# Altium PCB AT89S52单片机入门与提高_粗.PcbDoc (part 1 of 5)
Units mm, origin at the board's own origin, x right, y up, seen from the top; angles counter-clockwise.
Board outline 152.4 x 101.6 mm, 2 copper layers (Top Layer, Bottom Layer); 111 components, 112 nets, 451 pads, 42 vias.
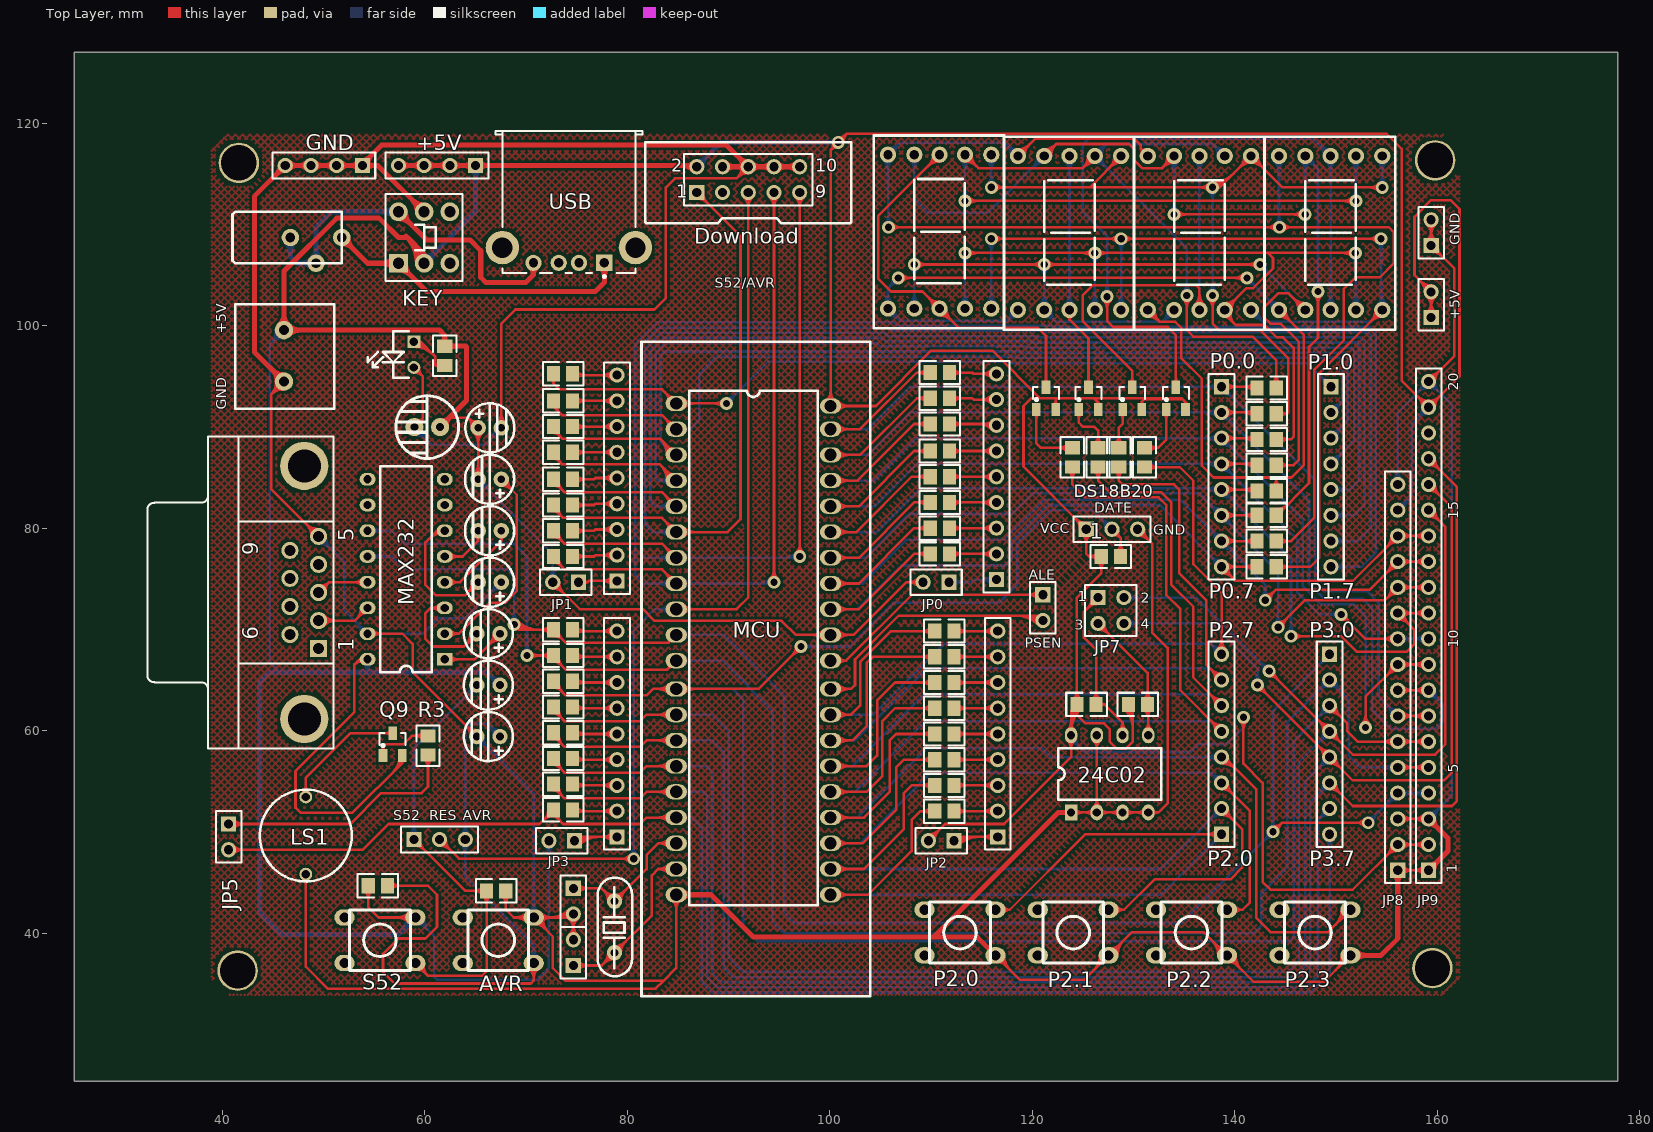
[diagram p0: Top Layer view]
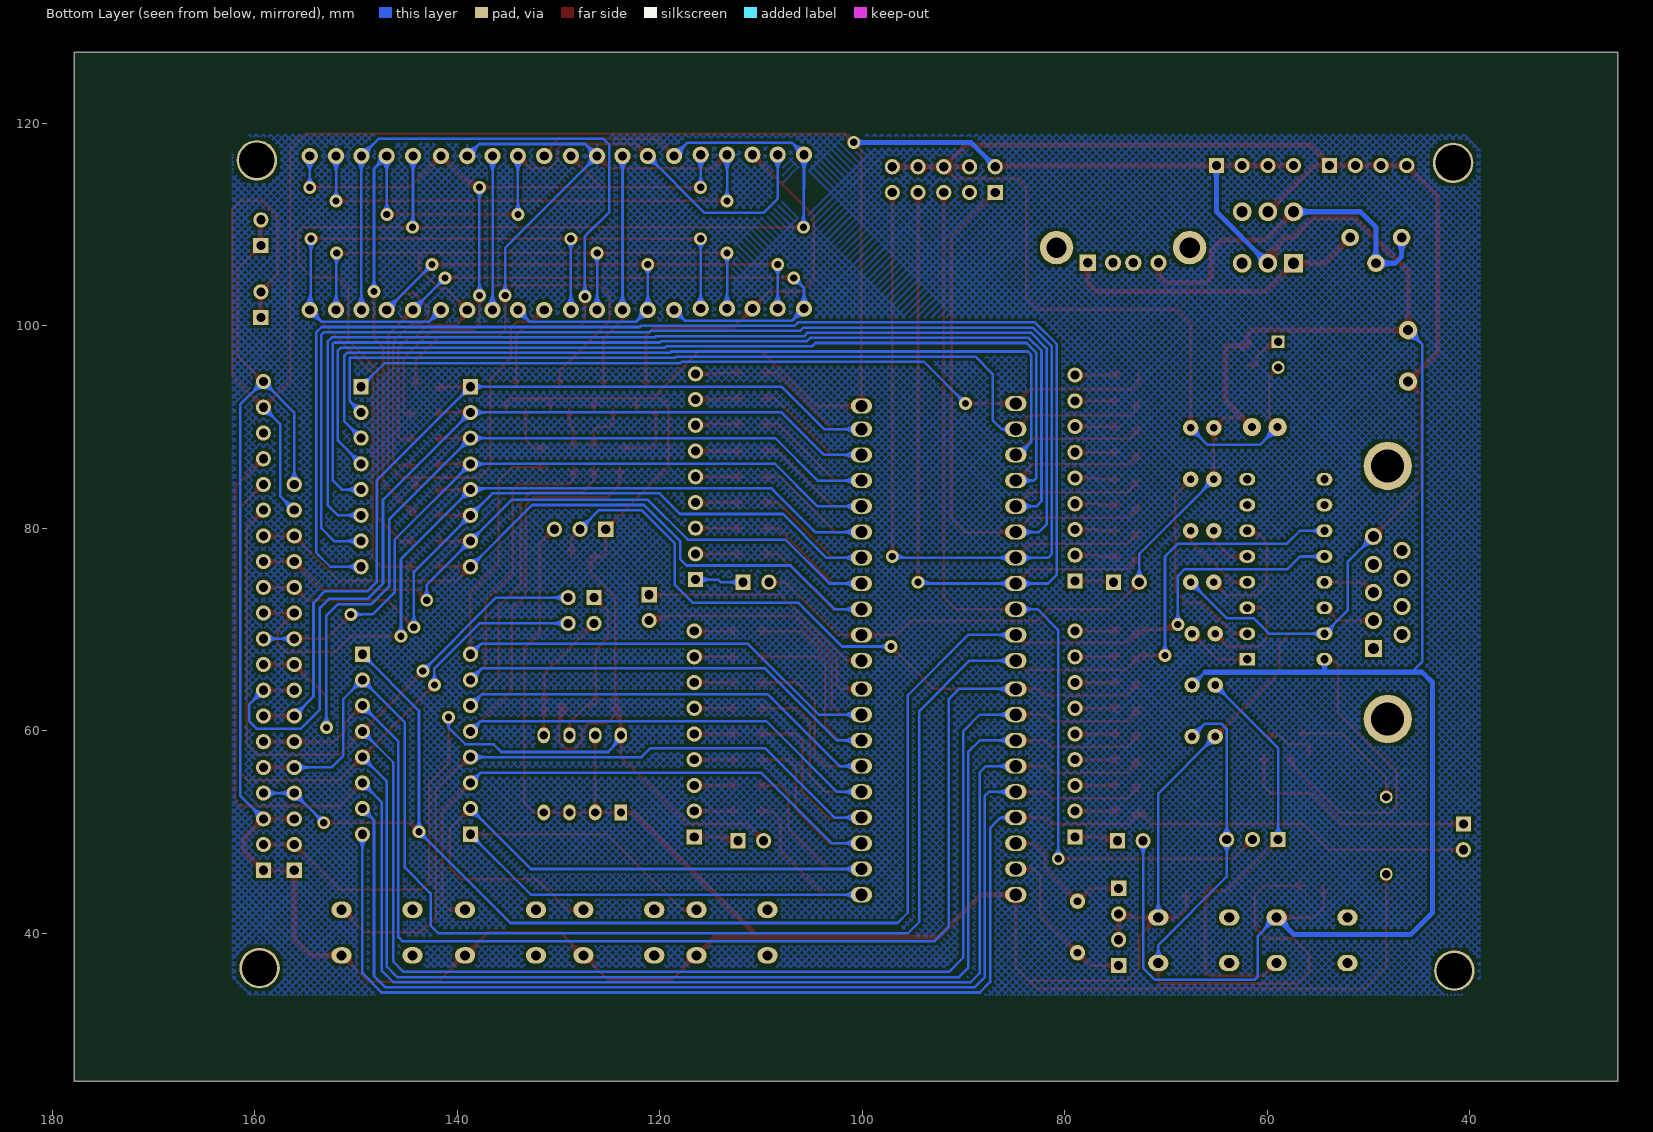
[diagram p1: Bottom Layer view, seen from below]

## Layer stack, top to bottom
Top Layer: signal copper 0.0356
Dielectric: dielectric 0.32, FR-4, Dk 4.8
Bottom Layer: signal copper 0.0356

## Board outline
25.4,25.4 177.8,25.4 177.8,127 25.4,127

## Design rules (kind name [scope] priority, off if disabled: settings)
Clearance [All] p1: gap=0.254
ComponentClearance [All] p1: gap=0.254 collisioncheckmode=3 verticalgap=0.254
PolygonConnect [All] p1: connectstyle=Relief reliefconductorwidth=0.254 reliefentries=4 polygonreliefangle="90 Angle"
RoutingVias [All] p1: holewidth=0.711 width=1.27 viastyle="Through Hole" minholewidth=0.711 minwidth=1.27 maxholewidth=0.711 maxwidth=1.27
SolderMaskExpansion [All] p1: expansion=0.102
TestPointUsage [All] p1: valid=0 allowmultiple=FALSE
Testpoint [All] p1: side=15 testpointundercomponent=TRUE minsize=1.016 maxsize=2.54 preferedsize=1.524 minholesize=0 maxholesize=1.016 preferedholesize=0.813 testpointgrid=0.025 style=1023 order=0-112345678
Width Width_4 [InNet('GND')] p1: maxlimit=0.5 minlimit=0.5 preferedwidth=0.5
Width Width_3 [InNet('NetJ1_1')] p2: maxlimit=0.5 minlimit=0.5 preferedwidth=0.5
Width Width_2 [InNet('NetJ1_2')] p3: maxlimit=0.5 minlimit=0.5 preferedwidth=0.5
Width Width_1 [InNet('VCC')] p4: maxlimit=0.5 minlimit=0.5 preferedwidth=0.5
Width [All] p5: maxlimit=0.254 minlimit=0.254 preferedwidth=0.254
17 further rules are at their usual default settings.

## Classes and differential pairs
component class AT89S52单片机入门与提高: +5V AVR Designator5

## Components (designator, comment, footprint, x,y, rotation, side; value= is the part's Value field where it differs from the comment)
1 "470" R2012-0805 127.762,77.216 r180 top (schematic designator R20)
24C02 "24LC02" DIP8 123.825,51.943 r90 top (schematic designator U2)
+5V "" HDR1X4 65.024,115.824 r180 top
+5V "" JK128 47.244,99.06 r0 top (schematic designator POWER)
+5V "Comment" HDR-2 160.528,104.648 r90 top
ALE "Comment" HDR-2 119.888,69.596 r270 top
AVR "" an-6*6 61.087,44.45 r180 top
C1 "100uF\25v" C-DJ-6 58.928,89.916 r180 top
C2 "10uf" C-DJ-4 65.024,67.056 r180 top
C3 "10uf" C-DJ-4 65.024,61.976 r180 top
C5 "10uf" C-DJ-4 67.691,87.376 r0 top
C6 "10uf" C-DJ-4 65.151,87.376 r180 top
C7 "10uf" C-DJ-4 65.151,82.296 r180 top
C8 "10uf" C-DJ-4 65.151,77.216 r180 top
C9 "10uf" C-DJ-4 65.024,72.136 r180 top
CX1 "30p" HDR1X2 74.676,36.83 r90 top
CX2 "30p" HDR1X2 74.676,44.45 r270 top
D1-0 "LED" R2012-0805 110.871,95.377 r180 top
D1-1 "LED" R2012-0805 73.66,95.25 r180 top
D1-2 "LED" R2012-0805 111.318,52.07 r180 top
D1-3 "LED" R2012-0805 73.66,69.977 r180 top
D2-0 "LED" R2012-0805 110.871,92.837 r180 top
D2-1 "LED" R2012-0805 73.66,92.583 r180 top
D2-2 "LED" R2012-0805 111.318,54.61 r180 top
D2-3 "LED" R2012-0805 73.66,67.437 r180 top
D3-0 "LED" R2012-0805 110.871,90.297 r180 top
D3-1 "LED" R2012-0805 73.66,90.043 r180 top
D3-2 "LED" R2012-0805 111.318,57.15 r180 top
D3-3 "LED" R2012-0805 73.66,64.897 r180 top
D4-0 "LED" R2012-0805 110.871,87.63 r180 top
D4-1 "LED" R2012-0805 73.66,87.503 r180 top
D4-2 "LED" R2012-0805 111.318,59.69 r180 top
D4-3 "LED" R2012-0805 73.66,62.357 r180 top
D5-0 "LED" R2012-0805 110.871,85.09 r180 top
D5-1 "LED" R2012-0805 73.66,84.836 r180 top
D5-2 "LED" R2012-0805 111.318,62.23 r180 top
D5-3 "LED" R2012-0805 73.66,59.817 r180 top
D6-0 "LED" R2012-0805 110.871,82.55 r180 top
D6-1 "LED" R2012-0805 73.66,82.296 r180 top
D6-2 "LED" R2012-0805 111.318,64.77 r180 top
D6-3 "LED" R2012-0805 73.66,57.277 r180 top
D7-0 "LED" R2012-0805 110.871,80.01 r180 top
D7-1 "LED" R2012-0805 73.66,79.756 r180 top
D7-2 "LED" R2012-0805 111.318,67.31 r180 top
D7-3 "LED" R2012-0805 73.66,54.737 r180 top
D8-0 "LED" R2012-0805 110.871,77.47 r180 top
D8-1 "LED" R2012-0805 73.66,77.216 r180 top
D8-2 "LED" R2012-0805 111.318,69.85 r180 top
D8-3 "LED" R2012-0805 73.66,52.197 r180 top
Download "Download" HDR-2x5 91.948,113.284 r0 top
DS1 "LG5011BSR" LED-BSR 110.744,106.807 r0 top
DS2 "LG5011BSR" LED-BSR 123.571,106.68 r0 top
DS3 "LG5011BSR" LED-BSR 136.398,106.68 r0 top
DS4 "LG5011BSR" LED-BSR 149.352,106.68 r0 top
DS18B20 "Comment" HDR-3 131.572,78.74 r0 top
GND "" HDR1X4 53.848,115.824 r180 top
GND "Comment" HDR-2 160.528,111.76 r90 top
J61 "D Connector 9" DSUB1.385-2H9 38.608,73.66 r90 top
JP0 "" HDR1X2 111.76,74.676 r180 top
JP1 "" HDR1X2 75.184,74.676 r180 top
JP2 "" HDR1X2 112.268,49.149 r180 top
JP3 "" HDR1X2 74.803,49.149 r180 top
JP5 "" HDR1X2 40.64,50.8 r270 top (schematic designator JP6)
JP7 "" HDR2X2 126.492,73.152 r270 top
JP8 "Header 16" HDR1X16 156.083,46.228 r90 top
JP9 "" HDR1X20 159.131,46.228 r90 top
KEY "SW-DPST" DPDT-6 59.944,108.712 r90 top
LED1 "LED" LED 58.42,96.393 r90 top
LS1 "" LS1PF 48.26,53.467 r270 top
MAX232 "MAX232" DIP16 61.976,67.056 r180 top (schematic designator U4)
MCU "AT89S52" AT89S52Pid 116.84,65.532 r0 top (schematic designator U1)
P0.0 "" HDR1X8 138.684,93.98 r270 top (schematic designator P0)
P1.0 "" HDR1X8 149.479,93.98 r270 top (schematic designator P1)
P2.0 "key1" an-6*6 106.68,45.212 r180 top
P2.0 "" HDR1X8 138.684,49.784 r90 top (schematic designator P2)
P2.1 "key2" an-6*6 117.856,45.212 r180 top
P2.2 "key3" an-6*6 129.54,45.212 r180 top
P2.3 "key4" an-6*6 141.732,45.212 r180 top
P3.0 "" HDR1X8 149.352,67.564 r270 top (schematic designator P3)
P-R0 "" HDR1X9#1 116.459,95.25 r270 top
P-R1 "" HDR1X9#1 78.994,95.123 r270 top
P-R2 "" HDR1X9#2 116.586,49.53 r90 top
P-R3 "" HDR1X9#1 78.994,69.85 r270 top
Q1 "2N3906" SO-G3 122.301,92.71 r0 top
Q2 "2N3906" SO-G3 126.492,92.71 r0 top
Q3 "2N3906" SO-G3 130.81,92.71 r0 top
Q4 "2N3906" SO-G3 135.128,92.71 r0 top
Q9 "2N3906" SO-G3 57.785,58.547 r0 top
R1 "4.7k" R2012-0805 61.976,97.028 r270 top
R3 "10k" R2012-0805 60.325,58.547 r90 top
R4 "10k" R2012-0805 130.429,62.611 r180 top
R5 "10k" R2012-0805 125.349,62.611 r180 top
R11 "470" R2012-0805 143.129,93.853 r0 top
R12 "470" R2012-0805 143.129,91.313 r0 top
R13 "470" R2012-0805 143.129,88.773 r0 top
R14 "470" R2012-0805 143.129,86.233 r0 top
R15 "470" R2012-0805 143.129,83.693 r0 top
R16 "470" R2012-0805 143.129,81.28 r0 top
R17 "470" R2012-0805 143.129,78.74 r0 top
R18 "470" R2012-0805 143.129,76.2 r0 top
R20 "470" R2012-0805 123.952,86.995 r90 top
R21 "470" R2012-0805 126.492,86.995 r90 top
R22 "470" R2012-0805 128.524,86.995 r90 top
R23 "470" R2012-0805 131.064,86.995 r90 top
R51 "10k" R2012-0805 67.056,44.196 r0 top
Ravr "10k" R2012-0805 55.372,44.704 r180 top
RES "" HDR1X3 58.928,49.276 r0 top
S52 "" an-6*6 49.403,44.45 r180 top
USB "" USB-5V 70.612,108.712 r90 top
Y "Y" 11.0592M 78.74,43.18 r90 top
? "Comment" "prower xiao" 49.276,103.632 r0 top

## Footprints (in the part's own frame and the unit in brackets; to place one, negate y for a bottom-side part, rotate by r counter-clockwise, add the part's x,y. Pads: shape width x height; smd on the part's side, far side on the other; paste and mask are expansions set on the pad)
11.0592M [mil]
  round 60 hole 30: 1(-200,0) 2(0,0)
  silkscreen extent -292,-68 92,65
an-6*6 [mm]
  oval 2x1.6 hole 1: 1(-9.675,7.381) 2(-9.675,2.881) 3(-2.675,2.881) 4(-2.675,7.381)
  silkscreen extent -9.17,2.13 -3.18,8.13
AT89S52Pid [mil]
  oval 82.87x59.24 hole 47.75: 1(-1260.15,1054.96) 2(-1260.15,954.96) 3(-1260.15,854.96) 4(-1260.15,754.96) 5(-1260.15,654.96) 6(-1260.15,554.96) 7(-1260.15,454.96) 8(-1260.15,354.96) 9(-1260.15,254.96) 10(-1260.15,154.96) 11(-1260.15,54.96) 12(-1260,-55) 13(-1260,-155) 14(-1260,-255) 15(-1260,-355) 16(-1260,-455) 17(-1260,-555) 18(-1260,-655) 19(-1260,-755) 20(-1260,-855) 21(-660,-855) 22(-660,-755) 23(-660,-655) 24(-660,-555) 25(-660,-455) 26(-660,-355) 27(-660,-255) 28(-660,-155) 29(-660,-55) 30(-660.15,54.96) 31(-660.15,154.96) 32(-660.15,254.96) 33(-660.15,354.96) 34(-660.15,454.96) 35(-660.15,554.96) 36(-660.15,654.96) 37(-660.15,754.96) 38(-660.15,854.96) 39(-660.15,954.96) 40(-660,1045)
  silkscreen extent -1395,-1250 -505,1295
C-DJ-4 [mil]
  round 60 hole 30: 1(-95,100) 2(-5,100)
  silkscreen extent -145,5 46,195
C-DJ-6 [mm]
  round 1.8 hole 0.8: 1(-2.591,-0.076) 2(-0.051,-0.076)
  silkscreen extent -4.42,-3.18 1.78,3.02
DIP8 [mil]
  rect 62x48 hole 32: 1(-0.15,-0.04)
  oval 62x48 hole 32: 2(-0.15,-100.04) 3(-0.15,-200.04) 4(-0.15,-300.04) 5(299.85,-300.04) 6(299.85,-200.04) 7(299.85,-100.04) 8(299.85,-0.04)
  silkscreen extent 50,-350 250,50
DIP16 [mil]
  rect 62x49.21 hole 32: 1(-0.15,-0.04)
  oval 62x49.21 hole 32: 2(-0.15,-100.04) 3(-0.15,-200.04) 4(-0.15,-300.04) 5(-0.15,-400.04) 6(-0.15,-500.04) 7(-0.15,-600.04) 8(-0.15,-700.04) 9(299.85,-700.04) 10(299.85,-600.04) 11(299.85,-500.04) 12(299.85,-400.04) 13(299.85,-300.04) 14(299.85,-200.04) 15(299.85,-100.04) 16(299.85,-0.04)
  silkscreen extent 50,-750 250,50
DPDT-6 [mm]
  round 1.85 hole 1.1: 0(-2.54,-2.54) 0(2.54,-2.54) 2(-2.54,0) 3(2.54,0) 4(2.54,2.54)
  rect 1.85x1.85 hole 1.1: 1(-2.54,2.54)
  silkscreen extent -4.28,-3.81 4.28,3.81
DSUB1.385-2H9 [mm] "Connector; D Subminiature; 9 Position; Right Angle; Pitch 1.385 mm"
  rect 1.69x1.69 hole 1.09: 1(-5.54,-10.92)
  round 1.69 hole 1.09: 2(-2.77,-10.92) 3(0,-10.92) 4(2.77,-10.92) 5(5.54,-10.92) 6(-4.155,-8.08) 7(-1.385,-8.08) 8(1.385,-8.08) 9(4.155,-8.08)
  round 4.76 hole 3.26: 10(-12.495,-9.5) 11(12.495,-9.5)
  silkscreen extent -15.4,-12.4 15.4,6
HDR1X2 [mm] "Connector; Header; 2 Position"
  rect 1.5x1.5 hole 0.9: 1(0,0)
  round 1.5 hole 0.9: 2(2.54,0)
  silkscreen extent -1.27,-1.27 3.81,1.27
HDR1X3 [mm] "Connector; Header; 3 Position"
  rect 1.5x1.5 hole 0.9: 1(0,0)
  round 1.5 hole 0.9: 2(2.54,0) 3(5.08,0)
  silkscreen extent -1.27,-1.27 6.35,1.27
HDR1X4 [mm] "Connector; Header; 4 Position"
  rect 1.5x1.5 hole 0.9: 1(0,0)
  round 1.5 hole 0.9: 2(2.54,0) 3(5.08,0) 4(7.62,0)
  silkscreen extent -1.27,-1.27 8.89,1.27
HDR1X8 [mm] "Connector; Header; 8 Position"
  rect 1.5x1.5 hole 0.9: 1(0,0)
  round 1.5 hole 0.9: 2(2.54,0) 3(5.08,0) 4(7.62,0) 5(10.16,0) 6(12.7,0) 7(15.24,0) 8(17.78,0)
  silkscreen extent -1.27,-1.27 19.05,1.27
HDR1X9#1 [mm] "Connector; Header; 9 Position"
  round 1.5 hole 0.9: 1(0,0) 2(2.54,0) 3(5.08,0) 4(7.62,0) 5(10.16,0) 6(12.7,0) 7(15.24,0) 8(17.78,0)
  rect 1.5x1.5 hole 0.9: 9(20.32,0)
  silkscreen extent -1.27,-1.27 21.59,1.27
HDR1X9#2 [mm] "Connector; Header; 9 Position"
  rect 1.5x1.5 hole 0.9: 1(0,0)
  round 1.5 hole 0.9: 2(2.54,0) 3(5.08,0) 4(7.62,0) 5(10.16,0) 6(12.7,0) 7(15.24,0) 8(17.78,0) 9(20.32,0)
  silkscreen extent -1.27,-1.27 21.59,1.27
HDR1X16 [mm] "Connector; Header; 16 Position"
  rect 1.5x1.5 hole 0.9: 1(0,0)
  round 1.5 hole 0.9: 2(2.54,0) 3(5.08,0) 4(7.62,0) 5(10.16,0) 6(12.7,0) 7(15.24,0) 8(17.78,0) 9(20.32,0) 10(22.86,0) 11(25.4,0) 12(27.94,0) 13(30.48,0) 14(33.02,0) 15(35.56,0) 16(38.1,0)
  silkscreen extent -1.27,-1.27 39.37,1.27
HDR1X20 [mm] "Connector; Header; 20 Position"
  rect 1.5x1.5 hole 0.9: 1(0,0)
  round 1.5 hole 0.9: 2(2.54,0) 3(5.08,0) 4(7.62,0) 5(10.16,0) 6(12.7,0) 7(15.24,0) 8(17.78,0) 9(20.32,0) 10(22.86,0) 11(25.4,0) 12(27.94,0) 13(30.48,0) 14(33.02,0) 15(35.56,0) 16(38.1,0) 17(40.64,0) 18(43.18,0) 19(45.72,0) 20(48.26,0)
  silkscreen extent -1.27,-1.27 49.53,1.27
HDR2X2 [mm] "Connector; Header; 2x2 Position"
  rect 1.5x1.5 hole 0.9: 1(0,0)
  round 1.5 hole 0.9: 2(0,2.54) 3(2.54,0) 4(2.54,2.54)
  silkscreen extent -1.27,-1.27 3.81,3.81
HDR-2 [mm]
  rect 1.5x1.5 hole 0.9: 1(-3.84,1.148)
  round 1.5 hole 0.9: 2(-1.3,1.148)
  silkscreen extent -5.11,-0.12 -0.03,2.42
HDR-2x5 [mm]
  rect 1.5x1.5 hole 0.9: 1(-5.08,-0.127)
  round 1.5 hole 0.9: 2(-5.08,2.413) 3(-2.54,-0.127) 4(-2.54,2.413) 5(0,-0.127) 6(0,2.413) 7(2.54,-0.127) 8(2.54,2.413) 9(5.08,-0.127) 10(5.08,2.413)
  silkscreen extent -10.16,-3.17 10.16,4.83
HDR-3 [mm]
  rect 1.5x1.5 hole 0.9: 1(-6.253,1.165)
  round 1.5 hole 0.9: 2(-3.713,1.165) 3(-1.173,1.165)
  silkscreen extent -7.52,-0.11 0.1,2.43
JK128 [mil]
  round 71.81 hole 39.37: 1(-45,20) 2(-45,-180)
  silkscreen extent -235,-285 150,120
LED [mil]
  rect 50x50 hole 32: 1(80,-20)
  round 50 hole 32: 2(-20,-20)
  silkscreen extent -60,0 120,160
LED-BSR [mm]
  round 1.6 hole 0.9: 1(-5,-5.119) 2(-2.4,-5.119) 3(0.1,-5.119) 4(2.6,-5.119) 5(5.2,-5.119) 6(5.2,10.081) 7(2.6,10.081) 8(0.1,10.081) 9(-2.4,10.081) 10(-5,10.081)
  silkscreen extent -6.4,-7.07 6.5,11.98
LS1PF [mil] "LS1"
  round 50 hole 32: 1(0,0) 2(300,0)
  silkscreen extent -28,-178 328,178
"prower xiao" [mm]
  round 1.724 hole 0.962: 1(2.54,5.08) 2(0,2.54) 3(-2.54,5.08)
  silkscreen extent -8.25,2.54 2.54,7.62
R2012-0805 [mm] "Thermistor; 2 Leads"
  rect 1.3x1.5 smd: 1(-0.95,0) 2(0.95,0)
  silkscreen extent -2,-1.15 2,1.15
SO-G3 [mm] "SOT-23; 3 Leads; Body 3.0 x 2.6 mm, inc. leads (LxW max)"
  rect 0.85x1.3 smd: 1(-1.9,-0.983) 2(0,-0.983) 3(-0.95,1.217)
  silkscreen extent -2.23,-0.12 0.32,1.22
USB-5V [mm]
  rect 1.6x1.6 hole 0.92: 1(-2.503,-7.123)
  round 1.6 hole 0.92: 2(-2.503,-4.624) 3(-2.503,-2.624) 4(-2.503,-0.124)
  round 3.3 hole 2: 5(-1.002,2.947) 6(-1.002,-10.193)
  silkscreen extent -3.98,-10.87 10.5,3.63

## Part data
1 R1 R3 R4 R5 R11 R12 R13 R14 R15 R16 R17 R18 R20 R21 R22 R23 R51 Ravr: library part RES2
+5V GND USB: library part "Header 4", "Header, 4-Pin"
+5V JP0 JP1 JP2 JP3 JP5: library part "Header 2", "Header, 2-Pin"
AVR S52: library part SW-PB, "Switch"
C1 C2 C3 C5 C6 C7 C8 C9: library part "CAPACITOR POL", "Capacitor"
CX1 CX2: library part CAP, "Capacitor"
Download: library part "Header 5X2", "Header, 5-Pin, Dual row"
DS1 DS2 DS3 DS4: library part "Dpy Blue-CA", "14.2 mm General Purpose Blue 7-Segment Display: CA, RH DP, Gray Surface"
J61: "Receptacle Assembly, 9 Position, Right Angle"
JP7: library part "Header 2X2", "Header, 2-Pin, Dual row"
JP8: "Header, 16-Pin"
JP9: library part "Header 20", "Header, 20-Pin"
KEY: "Double-Pole, Single-Throw Switch"
LS1: library part Speaker, "Loudspeaker"
MCU: library part 8051
P0.0 P1.0 P2.0 P3.0: library part MHDR1X8, "Header, 8-Pin"
P2.0 P2.1 P2.2 P2.3: library part key
P-R0 P-R1 P-R2 P-R3: library part MHDR1X9, "Header, 9-Pin"
Q1 Q2 Q3 Q4 Q9: "PNP General Purpose Amplifier"
RES: library part "Header 3", "Header, 3-Pin"
Y: library part CRYSTAL, "Crystal"

## Free pads (board coordinates)
  round 4 hole 3.5: ""(41.529,36.322) ""(41.656,116.078) ""(159.512,36.576) ""(159.766,116.332)

## Via types
v1: diameter 1.27, hole 0.711, Top Layer to Bottom Layer, 42 vias

## Nets (pads, with @x,y where several pads share a name; then routed paths per layer and width w, separated by ;. In a path a pad name is that pad's centre, name@x,y a point inside that pad or via, vN(x,y) a via of type N, cw(c..) or ccw(c..) an arc to the next point about the centre after c; other vN are vias at no path point)
A: DS1.7 DS2.7 DS3.7 DS4.7 R11.2 | length 180
  Top Layer w0.254: v1(113.344,112.328) v1(151.952,112.328) ; DS1.7@113.344,116.215 cw(c113.344,114.59) 114.493,115.739 cw(c115.642,116.888) DS1.7@114.017,116.888 ; DS1.7@113.344,116.469 cw(c113.344,115.457) 114.059,116.172 cw(c114.775,116.888) DS1.7@113.763,116.888 ; DS1.7@113.344,116.888 114.662,115.57 124.98,115.57 DS2.7@126.171,116.761 ; v1@113.703,111.969 cw(c114.57,111.102) 114.57,112.328 cw(c114.57,113.554) v1@113.703,112.687 ; DS2.7@125.498,116.761 cw(c123.873,116.761) 125.022,115.612 cw(c126.171,114.463) DS2.7@126.171,116.088 ; DS2.7@125.752,116.761 cw(c124.74,116.761) 125.456,116.045 cw(c126.171,115.33) DS2.7@126.171,116.342 ; v1(135.255,102.997) 135.255,99.568 135.89,98.933 141.742,98.933 144.079,96.596 R11.2@144.079,93.853 ; R11.2@143.709,94.323 ccw(c142.816,95.216) 144.079,95.216 ccw(c145.342,95.216) R11.2@144.449,94.323 ; v1@151.593,111.969 ccw(c150.726,111.102) 150.726,112.328 ccw(c150.726,113.554) v1@151.593,112.687 ; 135.255,101.771 ccw(c134.029,101.771) 134.896,102.638 cw(c134.029,101.771) 135.255,101.771 ; 135.255,101.771 cw(c136.481,101.771) 135.614,102.638 ccw(c136.481,101.771) 135.255,101.771
  Bottom Layer w0.254: v1(113.344,112.328) DS1.7@113.344,116.888 ; v1(135.255,102.997) 135.255,107.677 DS2.7@126.171,116.761 127.352,117.942 137.817,117.942 DS3.7@138.998,116.761 ; v1(151.952,112.328) DS4.7@151.952,116.761 ; 113.344,113.554 ccw(c114.57,113.554) 113.703,112.687 cw(c114.57,113.554) 113.344,113.554 ; 113.344,113.554 cw(c112.118,113.554) 112.985,112.687 ccw(c112.118,113.554) 113.344,113.554 ; 113.344,115.263 ccw(c111.719,115.263) 112.868,116.412 cw(c111.719,115.263) 113.344,115.263 ; 113.344,115.263 cw(c114.969,115.263) 113.82,116.412 ccw(c114.969,115.263) 113.344,115.263 ; 113.344,115.876 ccw(c112.332,115.876) 113.048,116.591 cw(c112.332,115.876) 113.344,115.876 ; 113.344,115.876 cw(c114.356,115.876) 113.64,116.591 ccw(c114.356,115.876) 113.344,115.876 ; DS2.7@126.59,116.761 ccw(c127.602,116.761) 126.886,116.045 ; DS2.7@126.59,116.761 cw(c127.602,116.761) 126.886,117.476 ; DS2.7@126.59,116.761 ccw(c127.602,116.761) 126.886,116.045 ; DS2.7@126.59,116.761 cw(c127.602,116.761) 126.886,117.476 ; DS2.7@126.844,116.761 ccw(c128.469,116.761) 127.32,115.612 ; DS2.7@126.844,116.761 cw(c128.469,116.761) 127.32,117.909 ; DS2.7@126.844,116.761 ccw(c128.469,116.761) 127.32,115.612 ; DS2.7@126.844,116.761 cw(c128.469,116.761) 127.32,117.909 ; 126.886,116.045 ccw(c126.171,115.33) 126.171,116.342 cw(c126.171,115.33) 126.886,116.045 ; 126.886,117.476 cw(c126.171,118.191) 126.171,117.18 ccw(c126.171,118.191) 126.886,117.476 ; 127.32,115.612 ccw(c126.171,114.463) 126.171,116.088 cw(c126.171,114.463) 127.32,115.612 ; 127.32,117.909 cw(c126.171,119.058) 126.171,117.434 ccw(c126.171,119.058) 127.32,117.909 ; 135.255,104.223 ccw(c136.481,104.223) 135.614,103.356 cw(c136.481,104.223) 135.255,104.223 ; 135.255,104.223 cw(c134.029,104.223) 134.896,103.356 ccw(c134.029,104.223) 135.255,104.223 ; 137.849,117.909 ccw(c138.998,119.058) 138.998,117.434 cw(c138.998,119.058) 137.849,117.909 ; 137.849,117.909 cw(c136.7,116.761) 138.325,116.761 ccw(c136.7,116.761) 137.849,117.909 ; 138.283,117.476 ccw(c138.998,118.191) 138.998,117.18 cw(c138.998,118.191) 138.283,117.476 ; 138.283,117.476 cw(c137.567,116.761) 138.579,116.761 ccw(c137.567,116.761) 138.283,117.476 ; 151.952,113.554 ccw(c153.178,113.554) 152.311,112.687 cw(c153.178,113.554) 151.952,113.554 ; 151.952,113.554 cw(c150.726,113.554) 151.593,112.687 ccw(c150.726,113.554) 151.952,113.554 ; 151.952,115.136 ccw(c150.327,115.136) 151.476,116.285 cw(c150.327,115.136) 151.952,115.136 ; 151.952,115.136 cw(c153.577,115.136) 152.428,116.285 ccw(c153.577,115.136) 151.952,115.136 ; 151.952,115.749 ccw(c150.94,115.749) 151.656,116.464 cw(c150.94,115.749) 151.952,115.749 ; 151.952,115.749 cw(c152.964,115.749) 152.248,116.464 ccw(c152.964,115.749) 151.952,115.749
ALE: ALE.1 MCU.30 | length 29.1
  Top Layer w0.254: MCU.30@100.072,66.928 101.599,66.928 ; MCU.30@100.878,66.561 cw(c101.599,66.038) 101.599,66.928 ; MCU.30@100.878,67.295 ccw(c101.599,67.818) 101.599,66.928 ; ALE.1@120.595,72.995 ccw(c119.532,71.932) 119.532,73.436 ccw(c119.532,74.94) ALE.1@120.595,73.877 ; ALE.1@120.775,73.175 ccw(c120.145,72.545) 120.145,73.436 ccw(c120.145,74.327) ALE.1@120.775,73.697 ; ALE.1@121.036,73.436 108.107,73.436 101.599,66.928
B: DS1.6 DS2.6 DS3.6 DS4.6 R12.2 | length 155.6
  Top Layer w0.254: DS2.6@128.098,116.761 cw(c126.473,116.761) 127.622,115.612 cw(c128.771,114.463) DS2.6@128.771,116.088 ; DS2.6@128.352,116.761 cw(c127.34,116.761) 128.056,116.045 cw(c128.771,115.33) DS2.6@128.771,116.342 ; DS2.6@128.771,116.761 125.675,113.665 v1(115.951,113.665) v1(137.795,113.665) ; v1@137.436,113.306 ccw(c136.569,112.439) 136.569,113.665 ccw(c136.569,114.891) v1@137.436,114.024 ; v1(137.795,102.997) 137.795,100.203 138.43,99.568 142.494,99.568 145.288,96.774 145.288,91.44 145.161,91.313 ; v1@137.795,113.411 ccw(c137.795,114.506) 138.569,113.732 ; v1@137.795,113.919 ccw(c137.795,116.24) 139.436,114.599 ; v1@137.795,114.173 ccw(c137.795,117.107) 139.87,115.032 ; 139.003,114.165 cw(c137.795,115.373) v1(137.795,113.665) ; DS3.6@140.925,116.761 cw(c139.3,116.761) 140.449,115.612 cw(c141.598,114.463) 141.598,116.088 cw(c141.598,114.463) 142.747,115.612 cw(c143.896,116.761) DS3.6@142.271,116.761 ; DS3.6@141.179,116.761 cw(c140.167,116.761) 140.883,116.045 cw(c141.598,115.33) 141.598,116.342 cw(c141.598,115.33) 142.313,116.045 cw(c143.029,116.761) DS3.6@142.017,116.761 ; R12.2@144.079,91.313 145.161,91.313 ; R12.2@144.489,90.988 cw(c145.161,90.455) 145.161,91.313 ; R12.2@144.489,91.638 ccw(c145.161,92.171) 145.161,91.313 ; v1@154.193,113.299 ccw(c153.326,112.432) 153.326,113.658 ccw(c153.326,114.884) v1@154.193,114.017 ; v1(154.552,113.658) 144.701,113.658 DS3.6@141.598,116.761 138.502,113.665 ; 117.177,113.665 ccw(c117.177,112.439) 116.31,113.306 cw(c117.177,112.439) 117.177,113.665 ; 117.177,113.665 cw(c117.177,114.891) 116.31,114.024 ccw(c117.177,114.891) 117.177,113.665 ; 137.795,101.771 ccw(c136.569,101.771) 137.436,102.638 cw(c136.569,101.771) 137.795,101.771 ; 137.795,101.771 cw(c139.021,101.771) 138.154,102.638 ccw(c139.021,101.771) 137.795,101.771 ; v1(137.795,113.665) 138.502,113.665 ; 138.502,113.665 ccw(c138.502,113.427) 138.276,113.503 cw(c138.502,113.427) 138.502,113.665 ; 138.502,113.665 cw(c138.502,113.903) 138.276,113.827 ccw(c138.502,113.903) 138.502,113.665
  Bottom Layer w0.254: DS1.6@115.944,116.888 115.944,113.672 v1(115.951,113.665) ; v1(137.795,102.997) v1(137.795,113.665) ; v1(154.552,113.658) DS4.6@154.552,116.761 ; 115.944,115.263 ccw(c114.319,115.263) 115.468,116.412 cw(c114.319,115.263) 115.944,115.263 ; 115.944,115.263 cw(c117.569,115.263) 116.42,116.412 ccw(c117.569,115.263) 115.944,115.263 ; 115.944,115.876 ccw(c114.932,115.876) 115.648,116.591 cw(c114.932,115.876) 115.944,115.876 ; 115.944,115.876 cw(c116.956,115.876) 116.24,116.591 ccw(c116.956,115.876) 115.944,115.876 ; 137.795,104.223 ccw(c139.021,104.223) 138.154,103.356 cw(c139.021,104.223) 137.795,104.223 ; 137.795,104.223 cw(c136.569,104.223) 137.436,103.356 ccw(c136.569,104.223) 137.795,104.223 ; 137.795,112.439 ccw(c136.569,112.439) 137.436,113.306 cw(c136.569,112.439) 137.795,112.439 ; 137.795,112.439 cw(c139.021,112.439) 138.154,113.306 ccw(c139.021,112.439) 137.795,112.439 ; 154.552,114.884 ccw(c155.778,114.884) 154.911,114.017 cw(c155.778,114.884) 154.552,114.884 ; 154.552,114.884 cw(c153.326,114.884) 154.193,114.017 ccw(c153.326,114.884) 154.552,114.884 ; 154.552,115.136 ccw(c152.927,115.136) 154.076,116.285 cw(c152.927,115.136) 154.552,115.136 ; 154.552,115.136 cw(c156.177,115.136) 155.028,116.285 ccw(c156.177,115.136) 154.552,115.136 ; 154.552,115.749 ccw(c153.54,115.749) 154.256,116.464 cw(c153.54,115.749) 154.552,115.749 ; 154.552,115.749 cw(c155.564,115.749) 154.848,116.464 ccw(c155.564,115.749) 154.552,115.749 ; v1@115.592,114.024 ccw(c114.742,114.874) 115.944,114.874 cw(c114.742,114.874) v1@115.592,114.024 ; 115.944,114.908 ccw(c117.194,114.908) 116.31,114.024 cw(c117.194,114.908) 115.944,114.908
C: DS1.4 DS2.4 DS3.4 DS4.4 R13.2 | length 153.5
  Top Layer w0.254: v1(126.171,107.188) v1(113.344,107.188) 143.256,107.188 ; v1@126.53,106.829 cw(c127.397,105.962) 127.397,107.188 cw(c127.397,108.414) v1@126.53,107.547 ; DS3.4@138.998,100.888 cw(c138.998,100.232) 139.461,100.696 ; DS3.4@138.998,101.98 ccw(c138.998,102.991) 139.713,102.276 ccw(c140.429,101.561) DS3.4@139.417,101.561 ; DS3.4@138.998,102.234 ccw(c138.998,103.858) 140.147,102.709 ccw(c141.296,101.561) DS3.4@139.671,101.561 ; DS3.4@139.394,101.424 ccw(c140.182,101.153) 139.593,100.564 ; DS3.4@139.634,101.342 ccw(c140.609,101.006) 139.88,100.277 ; R13.2@144.079,88.773 145.542,88.773 145.796,89.027 145.796,97.814 144.749,98.861 144.134,98.861 142.919,100.076 140.081,100.076 138.998,101.159 DS3.4@138.998,101.561 141.149,103.712 141.812,103.712 143.764,105.664 143.764,106.68 143.256,107.188 ; R13.2@144.449,88.403 cw(c145.342,87.51) 145.342,88.773 cw(c145.342,90.036) R13.2@144.449,89.143 ; v1@151.533,106.829 ccw(c150.666,105.962) 150.666,107.188 ccw(c150.666,108.414) v1@151.533,107.547 ; v1(151.892,107.188) 143.256,107.188 ; 114.57,107.188 ccw(c114.57,105.962) 113.703,106.829 cw(c114.57,105.962) 114.57,107.188 ; 114.57,107.188 cw(c114.57,108.414) 113.703,107.547 ccw(c114.57,108.414) 114.57,107.188 ; 124.945,107.188 ccw(c124.945,108.414) 125.812,107.547 cw(c124.945,108.414) 124.945,107.188 ; 124.945,107.188 cw(c124.945,105.962) 125.812,106.829 ccw(c124.945,105.962) 124.945,107.188
  Bottom Layer w0.254: DS1.4@113.344,101.688 v1(113.344,107.188) ; DS2.4@126.171,101.561 v1(126.171,107.188) ; v1(151.892,107.188) 151.952,107.128 DS4.4@151.952,101.561 ; 113.344,102.699 ccw(c114.356,102.699) 113.64,101.984 cw(c114.356,102.699) 113.344,102.699 ; 113.344,102.699 cw(c112.332,102.699) 113.048,101.984 ccw(c112.332,102.699) 113.344,102.699 ; 113.344,103.312 ccw(c114.969,103.312) 113.82,102.163 cw(c114.969,103.312) 113.344,103.312 ; 113.344,103.312 cw(c111.719,103.312) 112.868,102.163 ccw(c111.719,103.312) 113.344,103.312 ; 113.344,105.962 ccw(c112.118,105.962) 112.985,106.829 cw(c112.118,105.962) 113.344,105.962 ; 113.344,105.962 cw(c114.57,105.962) 113.703,106.829 ccw(c114.57,105.962) 113.344,105.962 ; 126.171,102.572 ccw(c127.183,102.572) 126.467,101.857 cw(c127.183,102.572) 126.171,102.572 ; 126.171,102.572 cw(c125.159,102.572) 125.875,101.857 ccw(c125.159,102.572) 126.171,102.572 ; 126.171,103.185 ccw(c127.796,103.185) 126.647,102.036 cw(c127.796,103.185) 126.171,103.185 ; 126.171,103.185 cw(c124.546,103.185) 125.695,102.036 ccw(c124.546,103.185) 126.171,103.185 ; 126.171,105.962 ccw(c124.945,105.962) 125.812,106.829 cw(c124.945,105.962) 126.171,105.962 ; 126.171,105.962 cw(c127.397,105.962) 126.53,106.829 ccw(c127.397,105.962) 126.171,105.962 ; 151.952,102.572 ccw(c152.964,102.572) 152.248,101.857 cw(c152.964,102.572) 151.952,102.572 ; 151.952,102.572 cw(c150.94,102.572) 151.656,101.857 ccw(c150.94,102.572) 151.952,102.572 ; 151.952,103.185 ccw(c153.577,103.185) 152.428,102.036 cw(c153.577,103.185) 151.952,103.185 ; 151.952,103.185 cw(c150.327,103.185) 151.476,102.036 ccw(c150.327,103.185) 151.952,103.185 ; v1@151.533,106.829 cw(c150.521,105.817) 151.952,105.817 ccw(c150.521,105.817) v1@151.533,106.829 ; v1@151.712,107.008 cw(c151.134,106.43) 151.952,106.43 ccw(c151.134,106.43) v1@151.712,107.008 ; 151.952,106.106 cw(c152.974,106.106) 152.251,106.829 ccw(c152.974,106.106) 151.952,106.106
D: DS1.2 DS2.2 DS3.2 DS4.2 R14.2 | length 154.8
  Top Layer w0.254: v1(108.344,106.045) v1(121.171,106.045) v1(142.468,106.045) ; v1@108.703,105.686 cw(c109.57,104.819) 109.57,106.045 cw(c109.57,107.271) v1@108.703,106.404 ; v1@120.812,105.686 ccw(c119.945,104.819) 119.945,106.045 ccw(c119.945,107.271) v1@120.812,106.404 ; v1@121.53,105.686 cw(c122.397,104.819) 122.397,106.045 cw(c122.397,107.271) v1@121.53,106.404 ; v1@142.108,105.686 ccw(c141.241,104.819) 141.241,106.045 ccw(c141.241,107.271) v1@142.108,106.404 ; R14.2@144.079,86.233 145.796,86.233 146.304,86.741 146.304,98.425 144.526,100.203 143.51,100.203 142.875,100.838 142.875,101.807 144.272,103.204 145.309,103.204 DS4.2@146.952,101.561 ; R14.2@144.449,85.863 cw(c145.342,84.97) 145.342,86.233 cw(c145.342,87.496) R14.2@144.449,86.603 ; DS4.2@146.279,101.561 ccw(c144.654,101.561) 145.803,102.709 ccw(c146.952,103.858) DS4.2@146.952,102.234 ; DS4.2@146.533,101.561 ccw(c145.521,101.561) 146.237,102.276 ccw(c146.952,102.991) DS4.2@146.952,101.98
  Bottom Layer w0.254: DS1.2@108.344,101.688 v1(108.344,106.045) ; v1(121.171,106.045) DS2.2@121.171,101.561 122.352,100.38 132.817,100.38 DS3.2@133.998,101.561 ; v1(142.468,106.045) DS4.2@146.952,101.561 ; 108.344,102.699 ccw(c109.356,102.699) 108.64,101.984 cw(c109.356,102.699) 108.344,102.699 ; 108.344,102.699 cw(c107.332,102.699) 108.048,101.984 ccw(c107.332,102.699) 108.344,102.699 ; 108.344,103.312 ccw(c109.969,103.312) 108.82,102.163 cw(c109.969,103.312) 108.344,103.312 ; 108.344,103.312 cw(c106.719,103.312) 107.868,102.163 ccw(c106.719,103.312) 108.344,103.312 ; 108.344,104.819 ccw(c107.118,104.819) 107.985,105.686 cw(c107.118,104.819) 108.344,104.819 ; 108.344,104.819 cw(c109.57,104.819) 108.703,105.686 ccw(c109.57,104.819) 108.344,104.819 ; 121.171,102.572 ccw(c122.183,102.572) 121.467,101.857 cw(c122.183,102.572) 121.171,102.572 ; 121.171,102.572 cw(c120.159,102.572) 120.875,101.857 ccw(c120.159,102.572) 121.171,102.572 ; 121.171,103.185 ccw(c122.796,103.185) 121.647,102.036 cw(c122.796,103.185) 121.171,103.185 ; 121.171,103.185 cw(c119.546,103.185) 120.695,102.036 ccw(c119.546,103.185) 121.171,103.185 ; 121.171,104.819 ccw(c119.945,104.819) 120.812,105.686 cw(c119.945,104.819) 121.171,104.819 ; 121.171,104.819 cw(c122.397,104.819) 121.53,105.686 ccw(c122.397,104.819) 121.171,104.819 ; 121.886,100.845 ccw(c121.171,100.13) 121.171,101.142 cw(c121.171,100.13) 121.886,100.845 ; 121.886,100.845 cw(c122.602,101.561) 121.59,101.561 ccw(c122.602,101.561) 121.886,100.845 ; 122.32,100.412 ccw(c121.171,99.263) 121.171,100.888 cw(c121.171,99.263) 122.32,100.412 ; 122.32,100.412 cw(c123.469,101.561) 121.844,101.561 ccw(c123.469,101.561) 122.32,100.412 ; 132.849,100.412 ccw(c131.7,101.561) 133.325,101.561 cw(c131.7,101.561) 132.849,100.412 ; 132.849,100.412 cw(c133.998,99.263) 133.998,100.888 ccw(c133.998,99.263) 132.849,100.412 ; 133.283,100.845 ccw(c132.567,101.561) 133.579,101.561 cw(c132.567,101.561) 133.283,100.845 ; 133.283,100.845 cw(c133.998,100.13) 133.998,101.142 ccw(c133.998,100.13) 133.283,100.845 ; 143.335,105.178 ccw(c142.468,104.311) 142.468,105.537 cw(c142.468,104.311) 143.335,105.178 ; 143.335,105.178 cw(c144.202,106.045) 142.976,106.045 ccw(c144.202,106.045) 143.335,105.178 ; 145.803,102.709 ccw(c146.952,103.858) 146.952,102.234 cw(c146.952,103.858) 145.803,102.709 ; 145.803,102.709 cw(c144.654,101.561) 146.279,101.561 ccw(c144.654,101.561) 145.803,102.709 ; 146.237,102.276 ccw(c146.952,102.991) 146.952,101.98 cw(c146.952,102.991) 146.237,102.276 ; 146.237,102.276 cw(c145.521,101.561) 146.533,101.561 ccw(c145.521,101.561) 146.237,102.276
DP: DS1.5 DS2.5 DS3.5 DS4.5 R18.2 | length 170.9
  Top Layer w0.254: v1(115.951,108.585) v1(128.771,108.585) v1(154.432,108.585) ; v1@116.31,108.226 cw(c117.177,107.359) 117.177,108.585 cw(c117.177,109.811) v1@116.31,108.944 ; v1@128.412,108.226 ccw(c127.545,107.359) 127.545,108.585 ccw(c127.545,109.811) v1@128.412,108.944 ; v1@129.13,108.226 cw(c129.997,107.359) 129.997,108.585 cw(c129.997,109.811) v1@129.13,108.944 ; R18.2@144.079,76.2 147.447,76.2 148.336,77.089 148.336,95.345 DS4.5@154.552,101.561 ; R18.2@144.449,75.83 cw(c145.342,74.937) 145.342,76.2 cw(c145.342,77.463) R18.2@144.449,76.57 ; DS4.5@153.879,101.561 cw(c152.254,101.561) 153.403,100.412 cw(c154.552,99.263) DS4.5@154.552,100.888 ; v1@154.073,108.226 ccw(c153.206,107.359) 153.206,108.585 ccw(c153.206,109.811) v1@154.073,108.944 ; DS4.5@154.133,101.561 cw(c153.121,101.561) 153.837,100.845 cw(c154.552,100.13) DS4.5@154.552,101.142
  Bottom Layer w0.254: DS1.5@115.944,101.688 115.944,108.578 v1(115.951,108.585) ; DS2.5@128.771,101.561 v1(128.771,108.585) ; DS3.5@141.598,101.561 142.779,100.38 153.371,100.38 DS4.5@154.552,101.561 154.432,101.681 v1(154.432,108.585) ; 115.944,102.699 ccw(c116.956,102.699) 116.24,101.984 cw(c116.956,102.699) 115.944,102.699 ; 115.944,102.699 cw(c114.932,102.699) 115.648,101.984 ccw(c114.932,102.699) 115.944,102.699 ; 115.944,103.312 ccw(c117.569,103.312) 116.42,102.163 cw(c117.569,103.312) 115.944,103.312 ; 115.944,103.312 cw(c114.319,103.312) 115.468,102.163 ccw(c114.319,103.312) 115.944,103.312 ; 128.771,102.572 ccw(c129.783,102.572) 129.067,101.857 cw(c129.783,102.572) 128.771,102.572 ; 128.771,102.572 cw(c127.759,102.572) 128.475,101.857 ccw(c127.759,102.572) 128.771,102.572 ; 128.771,103.185 ccw(c130.396,103.185) 129.247,102.036 cw(c130.396,103.185) 128.771,103.185 ; 128.771,103.185 cw(c127.146,103.185) 128.295,102.036 ccw(c127.146,103.185) 128.771,103.185 ; 128.771,107.359 ccw(c127.545,107.359) 128.412,108.226 cw(c127.545,107.359) 128.771,107.359 ; 128.771,107.359 cw(c129.997,107.359) 129.13,108.226 ccw(c129.997,107.359) 128.771,107.359 ; 142.313,100.845 ccw(c141.598,100.13) 141.598,101.142 cw(c141.598,100.13) 142.313,100.845 ; 142.313,100.845 cw(c143.029,101.561) 142.017,101.561 ccw(c143.029,101.561) 142.313,100.845 ; 142.747,100.412 ccw(c141.598,99.263) 141.598,100.888 cw(c141.598,99.263) 142.747,100.412 ; 142.747,100.412 cw(c143.896,101.561) 142.271,101.561 ccw(c143.896,101.561) 142.747,100.412 ; 153.403,100.412 ccw(c152.254,101.561) 153.879,101.561 cw(c152.254,101.561) 153.403,100.412 ; 153.403,100.412 cw(c154.552,99.263) 154.552,100.888 ccw(c154.552,99.263) 153.403,100.412 ; 153.837,100.845 ccw(c153.121,101.561) 154.133,101.561 cw(c153.121,101.561) 153.837,100.845 ; 153.837,100.845 cw(c154.552,100.13) 154.552,101.142 ccw(c154.552,100.13) 153.837,100.845 ; 154.432,107.359 ccw(c153.206,107.359) 154.073,108.226 cw(c153.206,107.359) 154.432,107.359 ; 154.432,107.359 cw(c155.658,107.359) 154.791,108.226 ccw(c155.658,107.359) 154.432,107.359 ; v1@115.592,108.226 cw(c114.742,107.376) 115.944,107.376 ccw(c114.742,107.376) v1@115.592,108.226 ; 115.944,107.342 cw(c117.194,107.342) 116.31,108.226 ccw(c117.194,107.342) 115.944,107.342 ; DS4.5@154.076,102.036 ccw(c153.217,102.896) 154.432,102.896 cw(c153.217,102.896) DS4.5@154.076,102.036 ; 154.432,102.862 ccw(c155.853,102.862) 154.848,101.857 cw(c155.853,102.862) 154.432,102.862 ; 154.432,103.475 ccw(c156.466,103.475) 155.028,102.036 cw(c156.466,103.475) 154.432,103.475
E: DS1.1 DS2.1 DS3.1 DS4.1 R15.2 | length 158.2
  Top Layer w0.254: v1(106.76,104.728) v1(141.185,104.728) ; v1@107.119,104.369 cw(c107.986,103.502) 107.986,104.728 cw(c107.986,105.954) v1@107.119,105.087 ; DS3.1@131.398,100.888 cw(c131.398,99.263) 132.547,100.412 cw(c133.696,101.561) DS3.1@132.071,101.561 ; DS3.1@131.398,101.142 cw(c131.398,100.13) 132.113,100.845 cw(c132.829,101.561) DS3.1@131.817,101.561 ; DS3.1@131.398,101.561 132.579,100.38 134.112,100.38 134.722,99.77 134.722,96.774 136.728,94.767 136.728,86.182 137.897,85.014 143.901,85.014 ; v1@140.825,104.369 ccw(c139.958,103.502) 139.958,104.728 ccw(c139.958,105.954) v1@140.825,105.087 ; R15.2@144.079,83.693 144.079,84.836 ; DS4.1@144.352,100.888 cw(c144.352,99.263) 145.501,100.412 cw(c146.65,101.561) DS4.1@145.025,101.561 ; DS4.1@144.352,101.142 cw(c144.352,100.13) 145.067,100.845 cw(c145.783,101.561) DS4.1@144.771,101.561 ; DS4.1@144.352,101.561 146.812,99.101 146.812,86.233 145.593,85.014 143.901,85.014 ; 143.901,85.014 144.079,84.836 ; 144.079,84.836 ccw(c144.857,84.836) 144.392,84.212 cw(c144.857,84.836) 144.079,84.836 ; 144.079,84.836 cw(c143.301,84.836) 143.766,84.212 ccw(c143.301,84.836) 144.079,84.836
  Bottom Layer w0.254: v1(106.76,104.728) 105.744,103.712 DS1.1@105.744,101.688 106.925,100.507 117.517,100.507 ; DS2.1@118.571,101.561 117.517,100.507 ; v1(141.185,104.728) DS4.1@144.352,101.561 ; 105.744,102.699 ccw(c106.756,102.699) 106.04,101.984 cw(c106.756,102.699) 105.744,102.699 ; 105.744,102.699 cw(c104.732,102.699) 105.448,101.984 ccw(c104.732,102.699) 105.744,102.699 ; 105.744,103.312 ccw(c107.369,103.312) 106.22,102.163 cw(c107.369,103.312) 105.744,103.312 ; 105.744,103.312 cw(c104.119,103.312) 105.268,102.163 ccw(c104.119,103.312) 105.744,103.312 ; 105.893,103.861 ccw(c105.026,104.728) 106.252,104.728 cw(c105.026,104.728) 105.893,103.861 ; 105.893,103.861 cw(c106.76,102.994) 106.76,104.22 ccw(c106.76,102.994) 105.893,103.861 ; 106.459,100.972 ccw(c105.744,100.257) 105.744,101.269 cw(c105.744,100.257) 106.459,100.972 ; 106.459,100.972 cw(c107.175,101.688) 106.163,101.688 ccw(c107.175,101.688) 106.459,100.972 ; 106.893,100.539 ccw(c105.744,99.39) 105.744,101.015 cw(c105.744,99.39) 106.893,100.539 ; 106.893,100.539 cw(c108.042,101.688) 106.417,101.688 ccw(c108.042,101.688) 106.893,100.539 ; 117.517,100.507 ccw(c116.588,101.436) 117.899,101.518 cw(c116.588,101.436) 117.517,100.507 ; 117.517,100.507 cw(c118.446,99.578) 118.529,100.889 ccw(c118.446,99.578) 117.517,100.507 ; 117.915,100.904 ccw(c117.336,101.483) 118.153,101.534 cw(c117.336,101.483) 117.915,100.904 ; 117.915,100.904 cw(c118.493,100.326) 118.545,101.142 ccw(c118.493,100.326) 117.915,100.904 ; 142.052,103.861 ccw(c141.185,102.994) 141.185,104.22 cw(c141.185,102.994) 142.052,103.861 ; 142.052,103.861 cw(c142.919,104.728) 141.693,104.728 ccw(c142.919,104.728) 142.052,103.861 ; 143.203,102.709 ccw(c144.352,103.858) 144.352,102.234 cw(c144.352,103.858) 143.203,102.709 ; 143.203,102.709 cw(c142.054,101.561) 143.679,101.561 ccw(c142.054,101.561) 143.203,102.709 ; 143.637,102.276 ccw(c144.352,102.991) 144.352,101.98 cw(c144.352,102.991) 143.637,102.276 ; 143.637,102.276 cw(c142.921,101.561) 143.933,101.561 ccw(c142.921,101.561) 143.637,102.276
F: DS1.9 DS2.9 DS3.9 DS4.9 R16.2 | length 170.5
  Top Layer w0.254: DS2.9@121.171,116.761 122.352,117.942 129.531,117.942 130.073,117.399 130.073,116.332 130.835,115.57 132.807,115.57 DS3.9@133.998,116.761 ; DS2.9@121.171,117.18 ccw(c121.171,118.191) 121.886,117.476 ccw(c122.602,116.761) DS2.9@121.59,116.761 ; DS2.9@121.171,117.434 ccw(c121.171,119.058) 122.32,117.909 ccw(c123.469,116.761) DS2.9@121.844,116.761 ; DS3.9@133.325,116.761 cw(c131.7,116.761) 132.849,115.612 cw(c133.998,114.463) DS3.9@133.998,116.088 ; DS3.9@133.579,116.761 cw(c132.567,116.761) 133.283,116.045 cw(c133.998,115.33) DS3.9@133.998,116.342 ; v1(133.998,110.998) v1(146.939,110.998) ; v1@134.357,110.639 cw(c135.224,109.772) 135.224,110.998 cw(c135.224,112.224) v1@134.357,111.357 ; R16.2@144.079,81.28 144.145,81.28 147.32,84.455 147.32,97.917 148.209,98.806 v1(148.209,103.378) ; R16.2@144.079,81.649 ccw(c144.079,82.699) 144.822,81.957 ; R16.2@144.079,81.903 ccw(c144.079,83.566) 145.255,82.39 ; R16.2@144.602,81.38 cw(c145.464,81.38) 144.854,81.989 ; v1@146.58,110.639 ccw(c145.713,109.772) 145.713,110.998 ccw(c145.713,112.224) v1@146.58,111.357 ; 148.209,102.152 ccw(c146.983,102.152) 147.85,103.019 cw(c146.983,102.152) 148.209,102.152 ; 148.209,102.152 cw(c149.435,102.152) 148.568,103.019 ccw(c149.435,102.152) 148.209,102.152
  Bottom Layer w0.254: DS1.9@108.344,116.888 108.344,112.534 109.728,111.15 115.561,111.15 DS2.9@121.171,116.761 ; v1(133.998,110.998) DS3.9@133.998,116.761 ; v1(146.939,110.998) 146.952,111.011 DS4.9@146.952,116.761 148.209,115.504 v1(148.209,103.378) ; 108.344,115.263 ccw(c106.719,115.263) 107.868,116.412 cw(c106.719,115.263) 108.344,115.263 ; 108.344,115.263 cw(c109.969,115.263) 108.82,116.412 ccw(c109.969,115.263) 108.344,115.263 ; 108.344,115.876 ccw(c107.332,115.876) 108.048,116.591 cw(c107.332,115.876) 108.344,115.876 ; 108.344,115.876 cw(c109.356,115.876) 108.64,116.591 ccw(c109.356,115.876) 108.344,115.876 ; 120.022,115.612 ccw(c118.873,116.761) 120.498,116.761 cw(c118.873,116.761) 120.022,115.612 ; 120.022,115.612 cw(c121.171,114.463) 121.171,116.088 ccw(c121.171,114.463) 120.022,115.612 ; 120.456,116.045 ccw(c119.74,116.761) 120.752,116.761 cw(c119.74,116.761) 120.456,116.045 ; 120.456,116.045 cw(c121.171,115.33) 121.171,116.342 ccw(c121.171,115.33) 120.456,116.045 ; 133.998,112.224 ccw(c135.224,112.224) 134.357,111.357 cw(c135.224,112.224) 133.998,112.224 ; 133.998,112.224 cw(c132.772,112.224) 133.639,111.357 ccw(c132.772,112.224) 133.998,112.224 ; 133.998,115.136 ccw(c132.373,115.136) 133.522,116.285 cw(c132.373,115.136) 133.998,115.136 ; 133.998,115.136 cw(c135.623,115.136) 134.474,116.285 ccw(c135.623,115.136) 133.998,115.136 ; 133.998,115.749 ccw(c132.986,115.749) 133.702,116.464 cw(c132.986,115.749) 133.998,115.749 ; 133.998,115.749 cw(c135.01,115.749) 134.294,116.464 ccw(c135.01,115.749) 133.998,115.749 ; 146.952,115.136 ccw(c145.327,115.136) 146.476,116.285 cw(c145.327,115.136) 146.952,115.136 ; 146.952,115.136 cw(c148.577,115.136) 147.428,116.285 ccw(c148.577,115.136) 146.952,115.136 ; 146.952,115.749 ccw(c145.94,115.749) 146.656,116.464 cw(c145.94,115.749) 146.952,115.749 ; 146.952,115.749 cw(c147.964,115.749) 147.248,116.464 ccw(c147.964,115.749) 146.952,115.749 ; 147.667,116.045 ccw(c146.952,115.33) 146.952,116.342 cw(c146.952,115.33) 147.667,116.045 ; 147.667,116.045 cw(c148.383,116.761) 147.371,116.761 ccw(c148.383,116.761) 147.667,116.045 ; 148.101,115.612 ccw(c146.952,114.463) 146.952,116.088 cw(c146.952,114.463) 148.101,115.612 ; 148.101,115.612 cw(c149.25,116.761) 147.625,116.761 ccw(c149.25,116.761) 148.101,115.612 ; 148.209,104.604 ccw(c149.435,104.604) 148.568,103.737 cw(c149.435,104.604) 148.209,104.604 ; 148.209,104.604 cw(c146.983,104.604) 147.85,103.737 ccw(c146.983,104.604) 148.209,104.604 ; v1@146.58,111.357 ccw(c145.681,112.256) 146.952,112.256 cw(c145.681,112.256) v1@146.58,111.357 ; v1@146.759,111.178 ccw(c146.294,111.643) 146.952,111.643 cw(c146.294,111.643) v1@146.759,111.178 ; 146.952,112.193 ccw(c148.134,112.193) 147.298,111.357 cw(c148.134,112.193) 146.952,112.193
G: DS1.10 DS2.10 DS3.10 DS4.10 R17.2 | length 186.1
  Top Layer w0.254: v1(105.791,109.728) v1(144.399,109.728) 155.194,109.728 155.702,109.22 155.702,106.172 154.305,104.775 151.892,104.775 150.749,103.632 150.749,98.552 147.828,95.631 147.828,81.026 145.542,78.74 R17.2@144.079,78.74 ; v1@106.15,109.369 cw(c107.017,108.502) 107.017,109.728 cw(c107.017,110.954) v1@106.15,110.087 ; DS2.10@118.571,116.761 120.26,118.45 130.095,118.45 130.688,117.856 130.688,117.47 ; DS2.10@118.571,117.18 ccw(c118.571,118.191) 119.286,117.476 ccw(c120.002,116.761) DS2.10@118.99,116.761 ; DS2.10@118.571,117.434 ccw(c118.571,119.058) 119.72,117.909 ccw(c120.869,116.761) DS2.10@119.244,116.761 ; DS3.10@131.398,116.761 130.688,117.47 ; v1@144.04,109.369 ccw(c143.173,108.502) 143.173,109.728 ccw(c143.173,110.954) v1@144.04,110.087 ; R17.2@144.449,78.37 cw(c145.342,77.477) 145.342,78.74 cw(c145.342,80.003) R17.2@144.449,79.11 ; v1@144.758,109.369 cw(c145.625,108.502) 145.625,109.728 cw(c145.625,110.954) v1@144.758,110.087 ; 130.688,117.47 ccw(c130.98,117.762) 131.139,117.382 cw(c130.98,117.762) 130.688,117.47 ; 130.688,117.47 cw(c130.397,117.179) 130.777,117.02 ccw(c130.397,117.179) 130.688,117.47
  Bottom Layer w0.254: v1(105.791,109.728) 105.791,109.855 DS1.10@105.744,116.888 106.941,118.085 117.247,118.085 DS2.10@118.571,116.761 ; DS4.10@144.352,116.761 144.352,109.775 v1(144.399,109.728) ; 105.751,115.876 ccw(c104.739,115.869) 105.45,116.589 cw(c104.739,115.869) 105.751,115.876 ; 105.751,115.876 cw(c106.762,115.883) 106.042,116.593 ccw(c106.762,115.883) 105.751,115.876 ; 105.755,115.263 ccw(c104.13,115.252) 105.271,116.409 cw(c104.13,115.252) 105.755,115.263 ; 105.755,115.263 cw(c107.38,115.274) 106.223,116.415 ccw(c107.38,115.274) 105.755,115.263 ; 106.459,117.603 ccw(c107.175,116.888) 106.163,116.888 cw(c107.175,116.888) 106.459,117.603 ; 106.459,117.603 cw(c105.744,118.318) 105.744,117.307 ccw(c105.744,118.318) 106.459,117.603 ; 106.893,118.036 ccw(c108.042,116.888) 106.417,116.888 cw(c108.042,116.888) 106.893,118.036 ; 106.893,118.036 cw(c105.744,119.185) 105.744,117.561 ccw(c105.744,119.185) 106.893,118.036 ; 117.422,117.909 ccw(c118.571,119.058) 118.571,117.434 cw(c118.571,119.058) 117.422,117.909 ; 117.422,117.909 cw(c116.273,116.761) 117.898,116.761 ccw(c116.273,116.761) 117.422,117.909 ; 117.856,117.476 ccw(c118.571,118.191) 118.571,117.18 cw(c118.571,118.191) 117.856,117.476 ; 117.856,117.476 cw(c117.14,116.761) 118.152,116.761 ccw(c117.14,116.761) 117.856,117.476 ; 144.352,115.136 ccw(c142.727,115.136) 143.876,116.285 cw(c142.727,115.136) 144.352,115.136 ; 144.352,115.136 cw(c145.977,115.136) 144.828,116.285 ccw(c145.977,115.136) 144.352,115.136 ; 144.352,115.749 ccw(c143.34,115.749) 144.056,116.464 cw(c143.34,115.749) 144.352,115.749 ; 144.352,115.749 cw(c145.364,115.749) 144.648,116.464 ccw(c145.364,115.749) 144.352,115.749 ; v1@105.429,110.085 ccw(c104.554,110.948) 105.784,110.956 cw(c104.554,110.948) v1@105.429,110.085 ; 105.784,110.952 ccw(c107.007,110.961) 106.148,110.09 cw(c107.007,110.961) 105.784,110.952 ; v1@144.04,110.087 ccw(c143.286,110.841) 144.352,110.841 cw(c143.286,110.841) v1@144.04,110.087 ; 144.352,110.455 ccw(c145.126,110.455) 144.579,109.908 cw(c145.126,110.455) 144.352,110.455 ; 144.352,111.068 ccw(c145.739,111.068) 144.758,110.087 cw(c145.739,111.068) 144.352,111.068